# EAGLE board mlx90614_small (EAGLE 4.16)
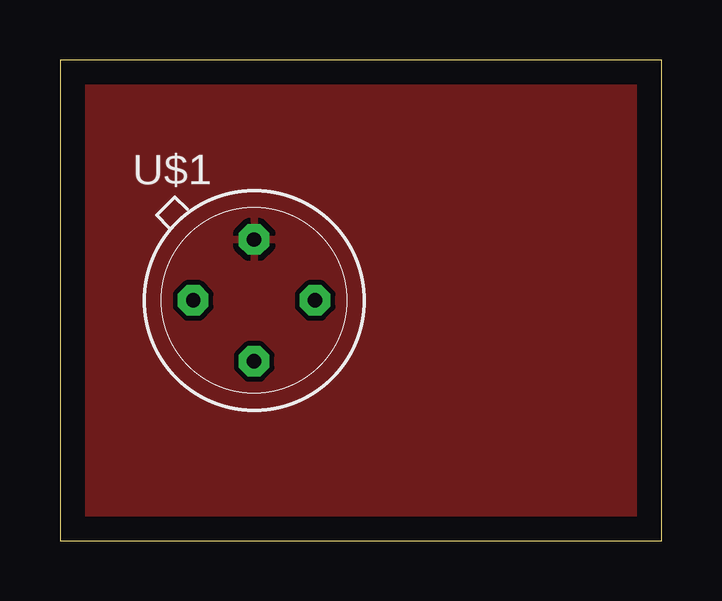
[diagram p0: board, top side]
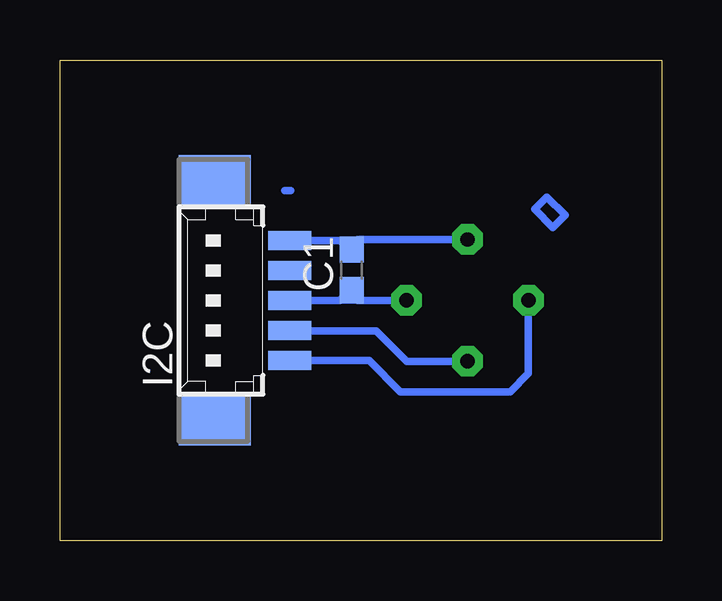
[diagram p1: board, bottom side, seen from below]

Size 25.07 x 20.06 mm. Coordinates in mm from the lower left corner, seen from the top.
Outline: 0,0 25.07,0 25.07,20.06 0,20.06 0,0
Copper layers (1*16): Top 0.035mm / dielectric 1.5mm / Bottom 0.035mm
Design rules "default": minimum track width 10mil, minimum drill 24mil, track to track 8mil, track to pad 8mil, pad to pad 8mil, via to via 8mil, smd to smd 8mil, copper to edge 40mil, drill to drill 8mil, minimum pad ring 10mil, minimum via ring 8mil, stop-mask expansion 4mil, vias tented up to drill 0mil, thermal gap 10mil

## Footprints (pad centres in the part's own frame; a part is rotated, then mirrored left to right if it is on the bottom)
C0603 = smd 1.1 x 1: 1 -0.85,0; 2 0.85,0
53398-05 = smd 0.8 x 1.8: 1 2.5,-2.5; 2 1.25,-2.5; 3 0,-2.5; 4 -1.25,-2.5; 5 -2.5,-2.5 | smd 2.1 x 3: S1 5,0.625; S2 -5,0.625
TO39/4 = drill 0.6 pad 1.27 octagon: 1 -2.54,0; 2 0,-2.54; 3 2.54,0; 4 0,2.54

## Placement (x,y rotation side)
C1  100nF  [C0603]  12.92,11.3 90 bottom
I2C  53398-05  [53398-05]  18,10.03 90 bottom
U$1  MAX90614  [TO39/4]  8.09,10.03 0 top

## Library data of the parts
C1 = rcl
I2C = con-molex
U$1 = paparazzi_mm

## Nets
+3V3: C1.1 I2C.3 U$1.3
+5V: I2C.2
GND: C1.2 I2C.1 U$1.4
SCL: I2C.5 U$1.1
SDA: I2C.4 U$1.2

## Tracks (layer width: path | path; a pad name or v marks a point on that pad's centre or on a via)
+3V3
  Bottom 0.305: I2C.3 13.42,10.03 12.92,10.54 C1.1 12.92,10.28 12.66,10.03 U$1.3
GND
  Bottom 0.305: I2C.1 13.38,12.53 12.92,12.06 | C1.2 12.92,12.31 12.66,12.57 U$1.4
  Bottom 0.406: C1.2 12.92,12.06
  pour Top (isolate 0.016): 0.47,19.68 24.6,19.68 24.6,0.38 0.47,0.38
N$1
  Bottom 0.305: 4.79,14.35 5.3,13.84 4.53,13.08 4.03,13.58 4.79,14.35
N$2
  Bottom 0.305: 15.46,14.6 15.71,14.6
SCL
  Bottom 0.305: I2C.5 12.19,7.53 10.88,6.22 6.31,6.22 5.55,6.98 U$1.1
SDA
  Bottom 0.305: 15.48,8.76 11.9,8.76 10.63,7.49 U$1.2
  Bottom 0.406: 15.48,8.76 I2C.4